# Altium PCB PCB1.PcbDoc (part 3 of 3)
Units mil, origin at the board's own origin, x right, y up, seen from the top; angles counter-clockwise.
Board outline 5410 x 4000 mil, 10 copper layers (Top Layer 1, Top Layer, Layer 5, Layer 3, Layer 1, Layer 2, Layer 4, Layer 6, Bottom Layer, Bottom Layer 1), stack 48.824 mil thick; 53 components, 189 nets, 458 pads, 144 vias.
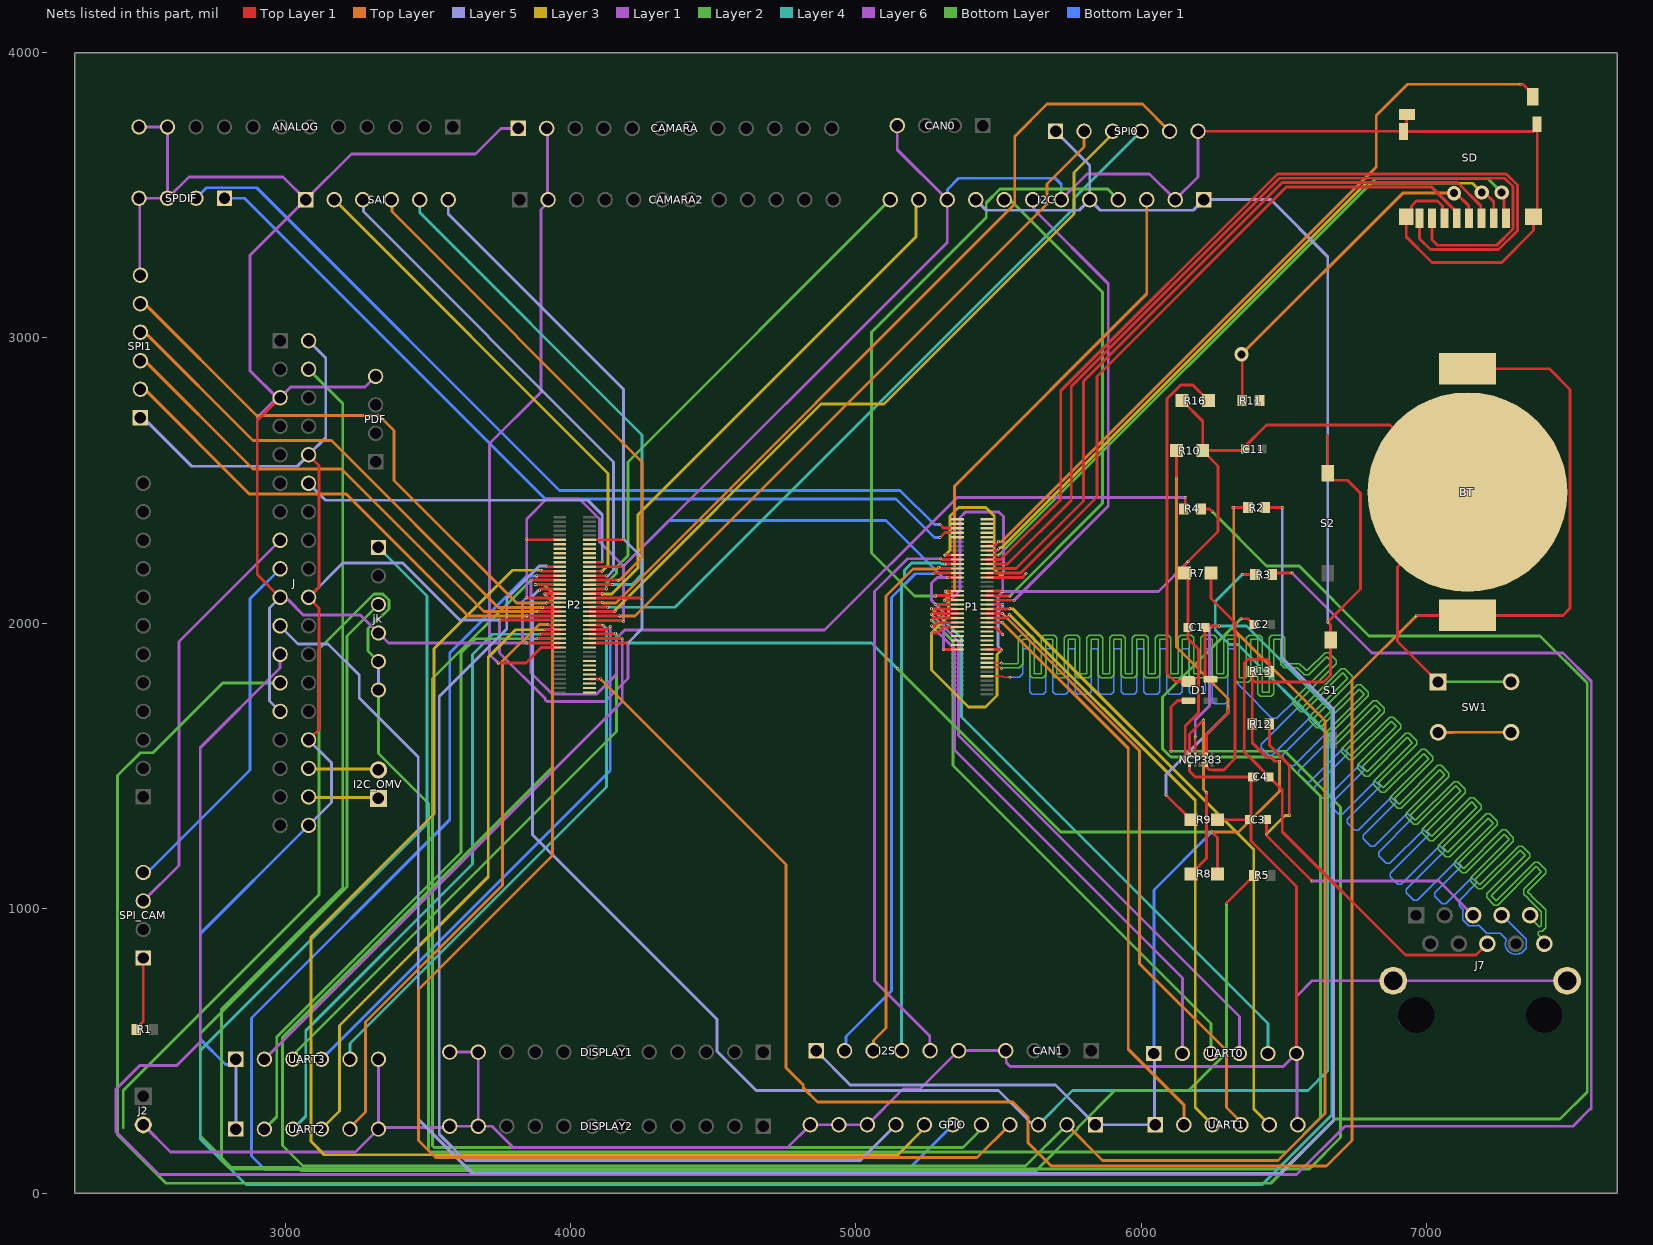
[diagram p11: the nets of this part, all layers, seen from the top]

## Via types
v1: diameter 10, hole 5, Top Layer 1 to Bottom Layer 1, 136 vias
v2: diameter 150, hole 100, Top Layer 1 to Bottom Layer 1, 4 vias
v3: diameter 50, hole 28, Top Layer 1 to Bottom Layer 1, 4 vias

## Nets (pads, with @x,y where several pads share a name; then routed paths per layer and width w, separated by ;. In a path a pad name is that pad's centre, name@x,y a point inside that pad or via, vN(x,y) a via of type N, cw(c..) or ccw(c..) an arc to the next point about the centre after c; other vN are vias at no path point) (continued)
ETH_C_P: J7.7 P1.9 | length 9533.3
  Top Layer 1 w5: P1.9@5460,1812.99 5460.37,1813.37 5514.31,1813.37 5517.68,1810 v1(5540,1810)
  Bottom Layer 1 w5: v1(5540,1810) 5560,1810 5573.11,1810 5584.82,1821.72 5584.82,1910 5609.82,1910 5609.82,1758.14 5618.61,1749.36 5656.04,1749.36 5664.82,1758.14 5664.82,1910 5689.82,1910 5689.82,1758.14 5698.61,1749.36 5736.04,1749.36 5744.82,1758.14 5744.82,1910 5769.82,1910 5769.82,1758.14 5778.61,1749.36 5816.04,1749.36 5824.82,1758.14 5824.82,1910 5849.82,1910 5849.82,1758.14 5858.61,1749.36 5896.04,1749.36 5904.82,1758.14 5904.82,1910 5929.82,1910 5929.82,1758.14 5938.61,1749.36 5976.04,1749.36 5984.82,1758.14 5984.82,1910 6009.82,1910 6009.82,1758.14 6018.61,1749.36 6056.04,1749.36 6064.82,1758.14 6064.82,1910 6089.82,1910 6089.82,1758.14 6098.61,1749.36 6136.04,1749.36 6144.82,1758.14 6144.82,1910 6169.82,1910 6169.82,1758.14 6178.61,1749.36 6216.04,1749.36 6224.82,1758.14 6224.82,1910 6249.82,1910 6249.82,1726.29 6258.61,1717.5 6296.04,1717.5 6304.82,1726.29 6304.82,1910 6329.82,1910 6329.82,1795.18 6370,1755 6450,1675 6454.87,1670.13 6459.27,1665.73 6475.84,1665.73 6538.26,1728.16 6555.94,1710.48 6420.73,1575.27 6420.73,1562.85 6447.2,1536.38 6459.62,1536.38 6594.83,1671.59 6612.51,1653.91 6496.77,1538.17 6496.77,1525.75 6523.23,1499.28 6535.66,1499.28 6651.4,1615.02 6669.08,1597.34 6553.34,1481.6 6553.34,1469.18 6579.8,1442.71 6592.23,1442.71 6707.97,1558.45 6725.65,1540.78 6609.91,1425.04 6609.91,1412.61 6636.37,1386.15 6648.8,1386.15 6764.54,1501.88 6782.21,1484.21 6666.47,1368.47 6666.47,1356.04 6692.94,1329.58 6705.37,1329.58 6821.1,1445.32 6838.78,1427.64 6723.04,1311.9 6723.04,1299.47 6749.51,1273.01 6761.93,1273.01 6877.67,1388.75 6895.35,1371.07 6779.61,1255.33 6779.61,1242.9 6806.08,1216.44 6818.5,1216.44 6934.24,1332.18 6951.92,1314.5 6833.07,1195.66 6833.07,1183.23 6859.54,1156.77 6871.96,1156.77 6990.81,1275.61 7008.49,1257.93 6873.28,1122.73 6873.28,1110.3 6899.74,1083.83 6912.17,1083.83 7047.38,1219.04 7065.06,1201.37 6929.85,1066.16 6929.85,1053.73 6956.31,1027.27 6968.74,1027.27 7103.95,1162.47 7121.62,1144.8 7030.42,1053.59 7030.42,1041.17 7056.88,1014.7 7069.31,1014.7 7160.52,1105.91 7178.19,1088.23 7115.77,1025.8 7115.77,1009.23 7123.45,1001.55 7128.32,996.68 7129.34,995.66 7129.34,991.52 7127.98,990.16 7127.98,959.84 7149.42,938.41 7179.74,938.41 7181.09,939.76 7185.24,939.76 7213.41,911.59 7259.74,911.59 7280.37,890.96 7280.37,888.89 7280.37,888 ccw(c7314.58,875) 7326.92,840.55 cw(c7328.57,835.83) 7327.83,840.77 7332.86,841.53 7351.17,859.84 7351.17,890.16 7266.33,975 J7.7@7264.58,975
ETH_D_N: J7.10 P1.15 | length 10925.7
  Top Layer 1 w5: P1.15@5460,1860.24 5460.37,1859.86 5496.15,1859.86 5496.62,1859.39 v1(5510.61,1859.39)
  Layer 2 w5: v1(5510.61,1859.39) 5510.96,1859.04 5514.32,1859.04 5515.43,1857.93 5560,1857.93 5566.89,1857.93 5569.82,1860.86 5569.82,1949.15 5578.61,1957.93 5616.04,1957.93 5624.82,1949.15 5624.82,1822.5 5649.82,1822.5 5649.82,1949.15 5658.61,1957.93 5696.04,1957.93 5704.82,1949.15 5704.82,1822.5 5729.82,1822.5 5729.82,1949.15 5738.61,1957.93 5776.04,1957.93 5784.82,1949.15 5784.82,1822.5 5809.82,1822.5 5809.82,1949.15 5818.61,1957.93 5856.04,1957.93 5864.82,1949.15 5864.82,1822.5 5889.82,1822.5 5889.82,1949.15 5898.61,1957.93 5936.04,1957.93 5944.82,1949.15 5944.82,1822.5 5969.82,1822.5 5969.82,1949.15 5978.61,1957.93 6016.04,1957.93 6024.82,1949.15 6024.82,1822.5 6049.82,1822.5 6049.82,1949.15 6058.61,1957.93 6096.04,1957.93 6104.82,1949.15 6104.82,1822.5 6129.82,1822.5 6129.82,1949.15 6138.61,1957.93 6176.04,1957.93 6184.82,1949.15 6184.82,1822.5 6209.82,1822.5 6209.82,1949.15 6218.61,1957.93 6256.04,1957.93 6264.82,1949.15 6264.82,1822.5 6289.82,1822.5 6289.82,1949.15 6298.61,1957.93 6336.04,1957.93 6344.82,1949.15 6344.82,1807.47 6369.82,1807.47 6369.82,1949.15 6378.61,1957.93 6416.04,1957.93 6424.82,1949.15 6424.82,1757.93 6449.82,1757.93 6449.82,1949.15 6458.61,1957.93 6496.04,1957.93 6504.82,1949.15 6504.82,1860.86 6507.75,1857.93 6530,1857.93 6554.61,1857.93 6573.77,1838.77 6578.65,1833.9 6582.79,1833.9 6645.22,1896.32 6657.64,1896.32 6684.11,1869.86 6684.11,1857.43 6548.9,1722.22 6566.58,1704.55 6701.78,1839.76 6714.21,1839.76 6740.67,1813.29 6740.67,1800.86 6605.47,1665.66 6623.14,1647.98 6758.35,1783.19 6770.78,1783.19 6797.24,1756.72 6797.24,1744.3 6662.03,1609.09 6679.71,1591.41 6814.92,1726.62 6827.35,1726.62 6853.81,1700.15 6853.81,1687.73 6718.6,1552.52 6736.28,1534.84 6871.49,1670.05 6883.91,1670.05 6910.38,1643.59 6910.38,1631.16 6775.17,1495.95 6792.85,1478.27 6928.06,1613.48 6940.48,1613.48 6966.95,1587.02 6966.95,1574.59 6831.74,1439.38 6849.42,1421.71 6984.63,1556.91 6997.05,1556.91 7023.52,1530.45 7023.52,1518.02 6888.31,1382.81 6905.99,1365.14 7041.19,1500.34 7053.62,1500.34 7080.08,1473.88 7080.08,1461.45 6944.88,1326.25 6962.55,1308.57 7097.76,1443.78 7110.19,1443.78 7136.65,1417.31 7136.65,1404.89 7001.44,1269.68 7019.12,1252 7154.33,1387.21 7166.76,1387.21 7193.22,1360.74 7193.22,1348.32 7058.01,1213.11 7075.69,1195.43 7210.9,1330.64 7223.33,1330.64 7249.79,1304.18 7249.79,1291.75 7114.58,1156.54 7132.26,1138.86 7267.47,1274.07 7279.89,1274.07 7306.36,1247.61 7306.36,1235.18 7171.15,1099.97 7188.83,1082.29 7324.04,1217.5 7336.46,1217.5 7362.93,1191.04 7362.93,1178.61 7227.72,1043.4 7245.4,1025.73 7380.6,1160.93 7393.03,1160.93 7419.5,1134.47 7419.5,1122.04 7357.07,1059.62 7357.07,1055.47 7366.4,1046.15 7371.27,1041.27 7418.77,993.77 7418.77,930.95 7407.06,919.24 7396.7,919.24 7393.77,916.31 7393.77,905.95 7414.58,885.14 J7.10@7414.58,875
ETH_D_P: J7.9 P1.13 | length 10876.2
  Top Layer 1 w5: P1.13@5460,1844.49 5460.37,1844.86 5489.94,1844.86 5490.41,1844.39 v1@5509.93,1844.39
  Layer 2 w5: v1(5510,1840.87) 5510.96,1841.82 5514.32,1841.82 5515.43,1842.93 5560,1842.93 5573.11,1842.93 5584.82,1854.65 5584.82,1942.93 5609.82,1942.93 5609.82,1816.29 5618.61,1807.5 5656.04,1807.5 5664.82,1816.29 5664.82,1942.93 5689.82,1942.93 5689.82,1816.29 5698.61,1807.5 5736.04,1807.5 5744.82,1816.29 5744.82,1942.93 5769.82,1942.93 5769.82,1816.29 5778.61,1807.5 5816.04,1807.5 5824.82,1816.29 5824.82,1942.93 5849.82,1942.93 5849.82,1816.29 5858.61,1807.5 5896.04,1807.5 5904.82,1816.29 5904.82,1942.93 5929.82,1942.93 5929.82,1816.29 5938.61,1807.5 5976.04,1807.5 5984.82,1816.29 5984.82,1942.93 6009.82,1942.93 6009.82,1816.29 6018.61,1807.5 6056.04,1807.5 6064.82,1816.29 6064.82,1942.93 6089.82,1942.93 6089.82,1816.29 6098.61,1807.5 6136.04,1807.5 6144.82,1816.29 6144.82,1942.93 6169.82,1942.93 6169.82,1816.29 6178.61,1807.5 6216.04,1807.5 6224.82,1816.29 6224.82,1942.93 6249.82,1942.93 6249.82,1816.29 6258.61,1807.5 6296.04,1807.5 6304.82,1816.29 6304.82,1942.93 6329.82,1942.93 6329.82,1801.26 6338.61,1792.47 6376.04,1792.47 6384.82,1801.26 6384.82,1942.93 6409.82,1942.93 6409.82,1751.72 6418.61,1742.93 6456.04,1742.93 6464.82,1751.72 6464.82,1942.93 6489.82,1942.93 6489.82,1854.65 6501.54,1842.93 6530,1842.93 6548.4,1842.93 6563.17,1828.17 6568.04,1823.29 6572.43,1818.9 6589,1818.9 6651.43,1881.32 6669.11,1863.65 6533.9,1728.44 6533.9,1716.01 6560.36,1689.55 6572.79,1689.55 6708,1824.76 6725.67,1807.08 6590.47,1671.87 6590.47,1659.44 6616.93,1632.98 6629.36,1632.98 6764.57,1768.19 6782.24,1750.51 6647.03,1615.3 6647.03,1602.87 6673.5,1576.41 6685.93,1576.41 6821.13,1711.62 6838.81,1693.94 6703.6,1558.73 6703.6,1546.31 6730.07,1519.84 6742.49,1519.84 6877.7,1655.05 6895.38,1637.37 6760.17,1502.16 6760.17,1489.74 6786.64,1463.27 6799.06,1463.27 6934.27,1598.48 6951.95,1580.8 6816.74,1445.6 6816.74,1433.17 6843.2,1406.7 6855.63,1406.7 6990.84,1541.91 7008.52,1524.24 6873.31,1389.03 6873.31,1376.6 6899.77,1350.14 6912.2,1350.14 7047.41,1485.34 7065.08,1467.67 6929.88,1332.46 6929.88,1320.03 6956.34,1293.57 6968.77,1293.57 7103.98,1428.78 7121.65,1411.1 6986.44,1275.89 6986.44,1263.46 7012.91,1237 7025.34,1237 7160.54,1372.21 7178.22,1354.53 7043.01,1219.32 7043.01,1206.9 7069.48,1180.43 7081.9,1180.43 7217.11,1315.64 7234.79,1297.96 7099.58,1162.75 7099.58,1150.33 7126.05,1123.86 7138.47,1123.86 7273.68,1259.07 7291.36,1241.39 7156.15,1106.19 7156.15,1093.76 7182.61,1067.29 7195.04,1067.29 7330.25,1202.5 7347.93,1184.83 7212.72,1049.62 7212.72,1037.19 7239.18,1010.73 7251.61,1010.73 7386.82,1145.93 7404.5,1128.26 7342.07,1065.83 7342.07,1049.26 7355.79,1035.54 7360.67,1030.67 7403.77,987.56 7403.77,937.17 7400.84,934.24 7396.7,934.24 7364.58,966.36 J7.9@7364.58,975
ETH_LED1: P1.17
ETH_LED2: P1.19
GND: ANALOG.11 ANALOG.12 BT.3 C1.1 C3.1 C4.1 C11.1 CAMARA.01 CAN0.04 CAN1.04 DISPLAY1.11 DISPLAY1.12 DISPLAY2.11 DISPLAY2.12 GPIO.09 GPIO.10 GPIO.11 I2C.02 I2C.06 I2C.10 I2S.06 J2.02 J7.S1 J7.S2 J.05 J.19 J.27 jk.04 NCP383.1 P1.22 P1.31 P1.42 P1.47 P1.54 P2.24 P2.33 P2.44 P2.57 P2.70 PDF.04 R7.1 R9.2 R10.2 R16.1 SAI.01 SD.6 SD.10 SD.S1 SD.S2 SD.S3 SD.S4 SPDIF.03 SPDIF.04 SPI0.06 SPI1.06 SW1.1 SW1.2 UART0.06 UART1.06 UART2.06 UART3.06 | length 27974.1
  Top Layer 1 w10: J.19@2980,2090 2900,2170 2900,2710 J.05@2980,2790 ; v1(3845,2090) 3847.72,2087.28 P2.44@3961.06,2087.28 ; v1(3845,2295) 3847.99,2292.01 P2.70@3961.06,2292.01 ; v1@3845.1,1929.9 3960.96,1929.9 P2.24@3961.06,1929.8 ; P2.33@4065,2008.54 4181.46,2008.54 v1(4185,2005) ; P2.57@4082.44,2197.52 4182.52,2197.52 v1(4185,2200) ; v1(5280,2065) v1(5280,2065) P1.42@5356.06,2064.96 ; v1(5307.48,1907.48) P1.22@5356.06,1907.48 ; v1(5320,2160) 5320.55,2159.45 P1.54@5356.06,2159.45 ; P1.31@5460,1986.22 5461.06,1985.16 5489.84,1985.16 v1(5515,1960) ; P1.47@5460,2112.21 5513.5,2112.21 v1(5515,2110.71) ; R16.1@6143.74,2780 6216.26,2707.48 R10.2@6216.26,2605 ; SPI0.06@6200,3725 6919.37,3725 SD.S4@6920.16,3724.21 ; R9.2@6267.52,1310 6367.09,1310 6385.47,1291.61 ; C11.1@6365.47,2610 6360.47,2605 R10.2@6216.26,2605 ; C11.1@6365.47,2620 6440.47,2695 6872.89,2695 7108.69,2459.2 BT.3@7145,2459.2 7145,2441.3 6900,2196.3 6900,1935.63 SW1.1@7042.05,1793.58 ; UART0.06@6545,490 6545,1075.36 6385.47,1234.89 6385.47,1291.61 ; SD.10@6932.95,3783.27 6930.91,3781.22 6930.91,3734.96 SD.S4@6920.16,3724.21 ; SD.6@7063.86,3420.08 7057.17,3426.77 7057.17,3462.83 7040,3480 6965,3480 6948.17,3463.17 6948.17,3447.1 6930,3428.94 6930,3355 7020,3265 7265,3265 7376.85,3376.85 SD.S1@7376.85,3425 7389.65,3437.8 SD.S3@7389.65,3737.99 ; SD.S3@7389.65,3749.8 SD.S3@7389.65,3737.99 ; R10.2@6216.26,2605 6270,2551.26 6270,2321 6152.48,2203.48 R7.1@6152.48,2175 6165,2162.48 C1.1@6165,1985 6165,1945 6202,1908 6202,1685.35 6155,1638.35 6155,1520 6165,1510 6170.31,1510 NCP383.1@6170.31,1505 6170.31,1480 6190.31,1460 C4.1@6390.47,1460 6385.47,1455 6385.47,1291.61 ; SD.S4@6920.16,3724.21 7375.87,3724.21 SD.S3@7389.65,3737.99
  Layer 1 w10: ANALOG.12@2485,3740 ANALOG.11@2585,3740 SPDIF.03@2585,3490 ; SPI1.06@2490,3220 2487.5,3222.5 2487.5,3487.5 SPDIF.04@2485,3490 SPDIF.03@2585,3490 ; J2.02@2500,240 2595,145 3245,145 UART2.06@3325,225 ; 2900,2720 J.05@2970,2790 ; J.19@2980,2090 2988.41,2081.59 3008.41,2081.59 3062.5,2027.5 3262.5,2027.5 jk.04@3325,1965 3360,1930 v1(3845,1930) 3830,1945 3830,2075 v1(3845,2090) v1(3845,2295) 3845,2365 3915,2435 4030,2435 4100,2365 4100,2285 v1(4185,2200) ; PDF.04@3315,2865 3277.5,2827.5 3017.5,2827.5 J.05@2980,2790 J.05@2970,2790 ; UART3.06@3325,470 UART2.06@3325,225 ; DISPLAY1.12@3575,495 DISPLAY1.11@3675,495 DISPLAY2.11@3675,235 ; CAMARA.01@3815,3735 3755,3735 3665,3645 3230,3645 SAI.01@3070,3485 ; v1(4185,2005) v1(4185,2200) ; CAN0.04@5145,3745 5145,3660 I2C.10@5320,3485 5320,3335 v1(4185,2200) ; v1(5307.48,1907.48) 5307.48,2037.52 v1(5280,2065) ; v1(5320,2160) 5285,2160 5265,2140 5265,2080 v1(5280,2065) ; v1(5515,1960) 5497.72,1977.28 5497.72,2093.42 v1(5515,2110.71) ; I2C.06@5720,3485 5810,3575 6030,3575 I2C.02@6120,3485 6200,3565 SPI0.06@6200,3725 ; v1(6165,2215) 6060.71,2110.71 v1(5515,2110.71) ; UART1.06@6550,240 6547.5,242.5 6547.5,487.5 UART0.06@6545,490 ; J7.S2@7494.5,745.08 J7.S1@6884.66,745.08 6884.58,745 6600,745 6545,690 UART0.06@6545,490 ; SPDIF.03@2585,3490 2660,3565 2990,3565 SAI.01@3070,3485 ; J.05@2970,2790 2875,2885 2875,3290 SAI.01@3070,3485 ; UART2.06@3325,225 3330,230 3570,230 DISPLAY2.12@3575,235 DISPLAY2.11@3675,235 ; DISPLAY2.11@3675,235 3722.72,235 3797.72,160 4760,160 GPIO.11@4840,240 GPIO.10@4940,240 GPIO.09@5040,240 5165,365 5225,365 I2S.06@5360,500 CAN1.04@5525,500 5526.97,498.03 5526.97,458.03 5540,445 6500,445 UART0.06@6545,490 ; v1(5280,2065) 5316.21,2065 5365,2113.79 5365,2370 5385,2390 5500,2390 5516.89,2373.11 5516.89,2178.46 5515,2176.57 v1(5515,2110.71)
  Layer 5 w10: J.27@2980,1690 2943,1727 2943,2053 J.19@2980,2090
  Bottom Layer w10: SW1.1@7042.05,1793.58 7042.47,1794 7297.53,1794 SW1.2@7297.95,1793.58
  Bottom Layer 1 w10: v1(4185,2200) 4345,2360 5105,2360 5305,2160 v1(5320,2160) ; I2C.10@5320,3485 5321.11,3486.11 5321.11,3521.11 5360,3560 5699.14,3560 5720,3539.14 I2C.06@5720,3485
GPIO_0: GPIO.02 P2.46 R2.1 | length 8572.5
  Top Layer 1 w10: v1(3907.28,2102.28) 3908.03,2103.03 P2.46@3961.06,2103.03 ; v1@6320,2405 v1(6325,2405) R2.1@6374.88,2405
  Layer 2 w10: v1(3907.28,2102.28) 3935,2074.56 3935,1493.79 2988.03,546.82 2988.03,166.97 3060,95 5595,95 GPIO.02@5740,240
  Top Layer w10: GPIO.02@5740,240 5865,115 6480,115 6645,280 6645,1657.5 6325,1977.5 v1(6325,2405)
GPIO_1: GPIO.03 P2.48 R3.1 | length 6304.3
  Top Layer 1 w10: v1(3890,2115) 3893.78,2118.78 P2.48@3961.06,2118.78 ; v1(6355,2170) R3.1@6399.88,2170
  Layer 5 w10: v1(3890,2115) 3885.94,2115 3865,2094.06 3865,1257.28 4511.97,610.31 4511.97,498.03 4650,360 5500,360 5611.59,248.41 5631.59,248.41 GPIO.03@5640,240
  Layer 4 w10: GPIO.03@5640,240 5760,360 6585,360 6655,430 6655,1610 6340,1925 6310,1925 6260,1975 6260,2075 v1(6355,2170)
GPIO_2: GPIO.04 P2.50 | length 4420.9
  Top Layer 1 w10: v1(3875,2135) 3875.47,2134.53 P2.50@3961.06,2134.53
  Top Layer w10: v1(3875,2135) 3905,2135 3935,2105 3935,1185 3465,715 3465,185 3525,125 5425,125 GPIO.04@5540,240
GPIO_3: GPIO.05 P2.52 R4.1 | length 7250.5
  Top Layer 1 w10: v1@3860.28,2150.28 P2.52@3961.06,2150.28 ; R4.1@6149.88,2400 6155,2405.12 v1(6155,2440)
  Layer 1 w10: v1(3860,2150) 3860,1825 3935,1750 4090,1750 4160,1820 4160,1946.21 4188.79,1975 4890,1975 5355,2440 v1(6155,2440)
  Bottom Layer w10: v1@3860.28,2150.28 v1(3860,2150) 3515,1805 3515,165.86 3520.86,160 5375,160 5427.82,212.82 5427.82,215.93 5440,228.11 GPIO.05@5440,240
GPIO_4: GPIO.06 P2.54 | length 5094
  Top Layer 1 w10: v1(3880.28,2165.28) 3881.02,2166.02 P2.54@3961.06,2166.02
  Bottom Layer 1 w10: v1(3880.28,2165.28) 3845.28,2165.28 3575,1895 3575,1310 2880,615 2880,130 2925,85 5185,85 GPIO.06@5340,240
GPIO_5: GPIO.07 P2.56 | length 4685.1
  Top Layer 1 w10: v1(3895,2185) 3898.23,2181.77 P2.56@3961.06,2181.77
  Layer 3 w10: v1(3895,2185) 3795,2185 3520,1910 3520,1330 3088.03,898.03 3088.03,181.97 3135,135 5146.89,135 5240,228.11 GPIO.07@5240,240
GPIO_6: GPIO.08 P2.58 | length 3903.5
  Top Layer 1 w10: v1(3915,2200) 3917.48,2197.52 P2.58@3961.06,2197.52
  Layer 5 w10: v1(3915,2200) 3888.79,2200 3775,2086.21 3775,1978.79 3538.03,1741.82 3538.03,206.97 3630,115 5015,115 GPIO.08@5140,240
HS: CAMARA2.02 CAMARA.02 P2.22 | length 2212.9
  Top Layer 1 w10: v1(3745,1860) 3842.14,1860 3896.2,1914.05 P2.22@3961.06,1914.05
  Layer 6 w10: v1(3745,1860) 3715,1890 3715,2629.31 3895,2809.31 3895,3450.65 3920,3475.65 CAMARA2.02@3920,3485 3917.5,3487.5 3917.5,3732.5 CAMARA.02@3915,3735
I2S_CK: I2S.02 P1.56 | length 1924.7
  Top Layer 1 w10: v1(5271.05,2172.74) 5273.5,2175.2 P1.56@5356.06,2175.2
  Bottom Layer 1 w10: I2S.02@4960,500 4964.68,504.68 4964.68,549.68 5125,710 5125,2090 5207.74,2172.74 v1(5271.05,2172.74)
I2S_SDI: I2S.04 P1.60 | length 1887.4
  Top Layer 1 w10: v1(5311.83,2207.44) 5312.58,2206.69 P1.60@5356.06,2206.69
  Layer 4 w10: I2S.04@5160,500 5160,2150 5170,2160 5170,2185 5195.61,2210.61 5296.82,2210.61 5299.98,2207.44 v1(5311.83,2207.44)
I2S_SDO: I2S.05 P1.62 | length 2031
  Top Layer 1 w10: v1(5297.61,2225.59) 5300.75,2222.44 P1.62@5356.06,2222.44
  Layer 1 w10: I2S.05@5260,500 5258.89,501.11 5258.89,551.11 5065,745 5065,2110 5180.59,2225.59 v1(5297.61,2225.59)
I2S_WS: I2S.03 P1.58 | length 1908.3
  Top Layer 1 w10: v1(5290.61,2195.61) 5295.27,2190.95 P1.58@5356.06,2190.95
  Top Layer w10: I2S.03@5060,500 5061.11,501.11 5061.11,536.11 5105,580 5105,2095 5200,2190 5285,2190 v1(5290.61,2195.61)
JTAG_RESET: P1.73
JTAG_TCK/SCK: P1.77
JTAG_TD0/SWO: P1.79
JTAG_TMS/SWD: P1.75
LICELL: BT.1 BT.2 P2.7 | length 7537.8
  Top Layer 1 w10: P2.7@4065,1803.82 v1(4103.82,1803.82) ; v1(6965,2025) 6966.72,2026.72 7480,2026.72 7505,2051.72 7505,2819 7432.32,2891.68 BT.2@7145,2891.68
  Top Layer w10: v1(4103.82,1803.82) 4755,1152.64 4755,440 4815,380 4815,370 4865,320 5550,320 5603.03,266.97 5603.03,176.97 5685,95 6650,95 6740,185 6740,1800 v1(6965,2025)
MISO_OMV: J.15 SPI_CAM.03 | length 1463.8
  Layer 6 w10: SPI_CAM.03@2500,1025 2625,1150 2625,1935 J.15@2980,2290
MOSI_OMV: J.17 SPI_CAM.04 | length 1272.6
  Bottom Layer 1 w10: SPI_CAM.04@2500,1125 2511.89,1125 2524.07,1137.18 2527.18,1137.18 2875,1485 2875,2085 J.17@2980,2190
NetC2_1: C2.1 jk.05 jk.06 | length 9904.8
  Top Layer 1 w10: v1(6350,2015) 6375.47,2015 C2.1@6395.47,1995
  Layer 5 w10: jk.06@3325,1765 jk.05@3325,1865
  Bottom Layer w10: 2430,230 2430,360 3116.97,1046.97 3116.97,1909.25 3309.69,2101.97 3340.31,2101.97 3361.97,2080.31 3361.97,2049.69 3327.28,2015 3322.72,2015 3288.03,1980.31 3288.03,1901.97 jk.05@3325,1865 ; jk.06@3325,1765 3325,1541.74 3500,1366.74 3500,150.86 3505.86,145 6510,145 6630,265 6630,1391.21 6491.21,1530 6105,1530 6100,1535 6098.79,1535 6075,1558.79 6075,1740 v1(6350,2015)
NetC3_2: C3.2 J7.5 R12.2 | length 1351.4
  Top Layer 1 w10: C3.2@6440,1310 v1(6440,1260) 6440,1255 v1(6600,1095) ; R12.2@6450.12,1645 6450.12,1571.1 6520,1501.21 v1(6519.98,1325.02)
  Layer 3 w10: v1(6440,1260) 6505.02,1325.02 v1(6519.98,1325.02)
  Layer 6 w10: v1(6600,1095) 7044.58,1095 J7.5@7164.58,975
NetC4_2: C4.2 J7.6 R13.2 | length 1693.2
  Top Layer 1 w10: R13.2@6450.24,1830 6450.24,1862.76 6440,1873 6375,1873 6362,1860 6362,1548 6416.22,1493.78 6416.22,1493.31 6495,1414.53 6495,1268 6928,835 7174.58,835 J7.6@7214.58,875
NetD1_1: D1.1 R16.2 | length 1239.2
  Top Layer 1 w10: D1.1@6166.42,1794.53 6119,1794.53 6091,1822.53 6091,2786.68 6139.32,2835 6181.26,2835 R16.2@6236.26,2780
NetD1_2: D1.2 jk.03 | length 8278.6
  Top Layer 1 w10: v1(6105,1550) 6105,1705 6127.6,1727.6 D1.2@6166.42,1727.6
  Bottom Layer w10: jk.03@3325,2065 3215,1955 3215,1075 2700,560 2700,200 2815,85 6590,85 6700,195 6700,1355 6505,1550 v1(6105,1550)
NetJ_04: J.04 R5.1 | length 7375.4
  Top Layer 1 w10: v1(6300,1015) 6300,1017.87 6394.76,1112.64 R5.1@6394.76,1115
  Layer 2 w10: J.04@3080,2890 3200,2770 3200,1070 2775,645 2775,115 2800,90 3043.79,90 3053.79,80 5632.28,80 5776.97,224.69 5776.97,229.25 5908.7,360.98 6168.27,360.98 6300,492.72 v1(6300,1015)
NetJ_21: J.21 R2.2 | length 7643.6
  Top Layer 1 w10: R2.2@6435.12,2405 v1(6495,2405)
  Layer 5 w10: J.21@2980,1990 3043.03,1926.97 3148.03,1926.97 3257.5,1817.5 3257.5,1737.5 3464.39,1530.61 3464.39,259.39 3653.79,70 6490,70 6675.86,255.86 6675.86,264.14 6675,265 6675,1697.5 6495,1877.5 v1(6495,2405)
NetJ_23: J.23 R3.2 | length 10099.9
  Top Layer 1 w10: R3.2@6460.12,2170 6465.12,2175 v1(6530,2175)
  Layer 1 w10: J.23@2980,1890 2980,1842.28 2700,1562.28 2700,530 2617.5,447.5 2487.5,447.5 2405,365 2405,215 2555,65 6545,65 6715,235 7515,235 7575,295 7579.14,295 7579.14,1795.86 7480,1895 6810,1895 v1(6530,2175)
NetJ_25: J.25 R4.2 | length 10364.6
  Top Layer 1 w10: R4.2@6210.12,2400 6240,2400 v1(6250,2390)
  Layer 2 w10: J.25@2980,1790 2778.79,1790 2533.79,1545 2490,1545 2410,1465 2410,205 2580,35 6455,35 6680,260 7470,260 7565,355 7565,1789.14 7399.14,1955 6800,1955 6555,2200 6440,2200 v1(6250,2390)
NetNCP383_7: NCP383.7 R9.1 R10.1 | length 1695.8
  Top Layer 1 w10: v1(6088,1397) R9.1@6175,1310 ; v1(6123.74,2506) R10.1@6123.74,2605 ; NCP383.7@6229.37,1536.5 6229.37,1609.37 6305,1685 v1(6305,1705)
  Top Layer w10: v1(6123.74,2506) 6123.74,1916.26 6305,1735 v1(6305,1705)
  Layer 5 w10: v1(6088,1397) 6088,1468 6305,1685 v1(6305,1705)
NetP1_72: P1.72
NetP2_1: P2.1
NetP2_3: P2.3
NetP2_5: P2.5
NetR1_1: R1.1 SPI_CAM.01 | length 260.4
  Top Layer 1 w10: R1.1@2474.88,575 2474.88,577.36 2500,602.48 SPI_CAM.01@2500,825
NetR11_1: R11.1 SD.4 | length 1260.3
  Top Layer 1 w10: v3@6350,2945 v3(6352.5,2942.5) 6355,2940 R11.1@6355,2780 ; v3(7097.75,3507.75) 7105.18,3507.75 7149.26,3463.67 7149.26,3421.3 SD.4@7150.47,3420.08
  Top Layer w10: v3(6352.5,2942.5) 6917.75,3507.75 v3(7097.75,3507.75)
PWM_0: J.12 P2.59 | length 1286.3
  Top Layer 1 w10: P2.59@4065,2213.27 4108.27,2213.27 v1(4110,2215)
  Layer 5 w10: J.12@3080,2490 3139.2,2430.8 4059.2,2430.8 4110,2380 v1(4110,2215)
PWM_1: P2.61
PWM_2: P2.63
PWM_3: P2.65
PWM_4: P2.67
PWM_5: P2.60
PWM_6: P2.62
PWM_7: P2.64
PWM_8: P2.66
PWM_9: P2.68
PWRON: SW1.3 SW1.4 | length 256.4
  Top Layer w10: SW1.3@7042.05,1616.42 7095.42,1616.42 7096,1617 7297.37,1617 SW1.4@7297.95,1616.42
RST: P2.21
RX: P1.76 SPDIF.02 | length 3181.1
  Top Layer 1 w10: v1(5295,2345) 5307.32,2332.68 P1.76@5356.06,2332.68
  Bottom Layer 1 w10: SPDIF.02@2685,3490 2721.97,3526.97 2898.03,3526.97 3960,2465 5155,2465 5275,2345 v1(5295,2345)
RX_N: P2.15
RX_P: P2.13
SAI_CK: P2.49 SAI.05 | length 1837.3
  Top Layer 1 w10: P2.49@4065,2134.53 4144.53,2134.53 v1(4145,2135)
  Layer 4 w10: SAI.05@3470,3485 3470,3440 4250,2660 4250,2170.86 4214.14,2135 v1(4145,2135)
SAI_D0: P2.53 SAI.03 | length 1757.7
  Top Layer 1 w10: P2.53@4065,2166.02 4124.25,2166.02 v1(4125,2165.28)
  Layer 5 w10: SAI.03@3270,3485 3271.97,3483.03 3271.97,3443.03 4150,2565 4150,2185.55 4129.72,2165.28 v1(4125,2165.28)
SAI_D1: P2.55 SAI.02 | length 1753.7
  Top Layer 1 w10: P2.55@4065,2181.77 v1(4109.25,2181.77)
  Layer 3 w10: SAI.02@3170,3485 4130,2525 4130,2202.52 v1(4109.25,2181.77)
SAI_FS: P2.51 SAI.04 | length 1837.8
  Top Layer 1 w10: P2.51@4065,2150.28 4164.72,2150.28 v1(4165,2150)
  Top Layer w10: SAI.04@3370,3485 3371.97,3483.03 3371.97,3443.03 4250,2565 4250,2230 4170,2150 v1(4165,2150)
SCL0: I2C.04 P1.46 | length 2257.7
  Top Layer 1 w10: v1(5280,2095) 5281.46,2096.46 P1.46@5356.06,2096.46
  Layer 2 w10: v1(5280,2095) 5205,2095 5055,2245 5055,3020 5456.97,3421.97 5456.97,3474.25 5504.69,3521.97 5883.03,3521.97 I2C.04@5920,3485
SCL1: I2C.08 P1.45 | length 1759.8
  Top Layer 1 w10: P1.45@5460,2096.46 5476.38,2096.46 5477.44,2095.39 5481.87,2095.39 5482.27,2095 v1(5540,2095)
  Layer 2 w10: I2C.08@5520,3485 5528.41,3476.59 5548.41,3476.59 5865,3160 5865,2420 v1(5540,2095)
SCL2: I2C.12 P2.47 | length 1838.8
  Top Layer 1 w10: P2.47@4065,2118.78 4124.25,2118.78 v1(4125,2119.53)
  Bottom Layer w10: v1(4125,2119.53) 4123.92,2120.61 4123.92,2138.26 4160,2174.34 4160,2196.21 4200,2236.21 4200,2565 I2C.12@5120,3485
SCL_OMV: I2C_OMV.02 J.32 | length 247.1
  Layer 3 w10: J.32@3080,1490 3082.5,1487.5 3322.5,1487.5 I2C_OMV.02@3325,1485
SDA0: I2C.03 P1.44 | length 1745.4
  Top Layer 1 w10: v1(5310,2080) 5310.71,2080.71 P1.44@5356.06,2080.71
  Top Layer w10: v1(5310,2080) 5345,2115 5345,2480 6020,3155 I2C.03@6020,3485
SDA1: I2C.07 P1.43 | length 1746.8
  Top Layer 1 w10: P1.43@5460,2080.71 5460.71,2080 v1(5555,2080)
  Layer 6 w10: v1(5555,2080) 5885,2410 5885,3190 5624.68,3450.32 5624.68,3480.32 I2C.07@5620,3485
SDA2: I2C.11 P2.45 | length 1907.4
  Top Layer 1 w10: P2.45@4065,2103.03 4109.25,2103.03 v1(4110,2102.28)
  Layer 3 w10: v1(4110,2102.28) 4143.5,2102.28 4235,2193.79 4235,2380 5210,3355 5210,3457.17 5211.59,3458.77 5211.59,3476.59 I2C.11@5220,3485
SDA_OMV: I2C_OMV.01 J.34 | length 247.1
  Layer 3 w10: J.34@3080,1390 3082.5,1387.5 3322.5,1387.5 I2C_OMV.01@3325,1385
SDC_CD: P1.67 SD.9 | length 2715.4
  Top Layer 1 w10: P1.67@5460,2269.69 5461.06,2270.75 5485.84,2270.75 5500,2284.91 v1(5500,2285) ; v1(7330,3890) 7335,3890 7340,3890 7373.9,3856.1 SD.9@7373.9,3845.28
  Top Layer w10: v1(5500,2285) 5510,2285 6825,3600 6825,3780 6935,3890 v1(7330,3890)
SDC_CLK: P1.55 SD.5 | length 2513.5
  Top Layer 1 w10: P1.55@5460,2175.2 5577.77,2175.2 5845,2442.43 5845,2865 6510,3530 7017.92,3530 7107.17,3440.75 SD.5@7107.17,3420.08
SDC_CMD: P1.57 SD.3 | length 2616.5
  Top Layer 1 w10: P1.57@5460,2190.95 5560.95,2190.95 5798.29,2428.29 5798.29,2848.29 6495,3545 7110,3545 7191.33,3463.67 7191.33,3422.53 SD.3@7193.78,3420.08
SDC_D0: P1.59 SD.7 | length 3191.9
  Top Layer 1 w10: P1.59@5460,2206.69 5531.69,2206.69 5755,2430 5755,2830 6485,3560 7275,3560 7304.17,3530.83 7304.17,3520.32 7305,3519.5 7305,3490.5 7304.17,3489.68 7304.17,3381.49 7247.68,3325 7040,3325 7020.55,3344.45 SD.7@7020.55,3420.08
SDC_D1: P1.61 SD.8 | length 3277.8
  Top Layer 1 w10: P1.61@5460,2222.44 5507.44,2222.44 5718.43,2433.43 5718.43,2814.65 6478.79,3575 7281.21,3575 7320,3536.21 7320,3376.1 7253.9,3310 7015,3310 6977.24,3347.76 SD.8@6977.24,3420.08
SDC_D2: P1.63 SD.1 | length 2469.6
  Top Layer 1 w10: P1.63@5460,2238.19 5501.81,2238.19 v1(5501.89,2238.11) ; v3(7265,3510) 7272.65,3502.35 7272.65,3427.82 SD.1@7280.39,3420.08
  Bottom Layer w10: v1(5501.89,2238.11) 6823.79,3560 7215,3560 v3(7265,3510)
SDC_D3: P1.65 SD.2 | length 2395.7
  Top Layer 1 w10: P1.65@5460,2253.94 5494.14,2253.94 5500,2259.8 v1(5500,2260) ; v3(7195,3510) 7205,3510 7237.09,3477.91 SD.2@7237.09,3420.08
  Layer 3 w10: v1(5500,2260) 5505,2265 5511.21,2265 6788.96,3542.75 7162.25,3542.75 v3(7195,3510)
SDC_RST: P1.71
SDC_WP: P1.69
SPI0_CK: P2.37 SPI0.03 | length 2626.7
  Top Layer 1 w10: P2.37@4065,2040.04 v1(4155,2040) v1(4155,2040)
  Layer 3 w10: v1(4155,2040) 4155,2045 4877.88,2767.88 5097.88,2767.88 5765,3435 5765,3580 5900,3715 SPI0.03@5900,3725
SPI0_CS: P2.35 SPI0.02 | length 2512.7
  Top Layer 1 w10: P2.35@4065,2024.29 4169.29,2024.29 v1(4170,2025)
  Top Layer w10: v1(4170,2025) 4225,2025 5670,3470 5670,3540 5800,3670 SPI0.02@5800,3725
SPI0_MISO: P2.39 SPI0.04 | length 2647.5
  Top Layer 1 w10: P2.39@4065,2055.79 4129.25,2055.79 v1(4130,2055.04)
  Layer 4 w10: v1(4130,2055.04) 4365.04,2055.04 5765,3455 5765,3490 SPI0.04@6000,3725
SPI0_MOSI: P2.41 SPI0.05 | length 2938.8
  Top Layer 1 w10: P2.41@4065,2071.53 4109.25,2071.53 v1(4110,2072.28)
  Top Layer w10: v1(4110,2072.28) 4112.72,2072.28 4114.21,2070.79 4158.07,2070.79 5556.97,3469.69 5556.97,3706.97 5670,3820 6005,3820 SPI0.05@6100,3725
SPI1_CK: P2.38 SPI1.03 | length 1820.6
  Top Layer 1 w10: v1(3885,2040) 3961.02,2040 P2.38@3961.06,2040.04
  Top Layer w10: SPI1.03@2505,2920 2885,2540 3195,2540 3695,2040 v1(3885,2040)
SPI1_CS: P2.36 SPI1.02 | length 1785.7
  Top Layer 1 w10: v1(3845,2025) 3960.35,2025 P2.36@3961.06,2024.29
  Top Layer w10: SPI1.02@2505,2820 2871.97,2453.03 3211.97,2453.03 3640,2025 v1(3845,2025)
SPI1_MISO: P2.40 SPI1.04 | length 1856.1
  Top Layer 1 w10: v1(3900,2055) 3943.62,2055 3944.41,2055.79 P2.40@3961.06,2055.79
  Top Layer w10: SPI1.04@2505,3020 2885,2640 3160,2640 3745,2055 v1(3900,2055)
SPI1_MOSI: P2.42 SPI1.05 | length 1994.1
  Top Layer 1 w10: v1(3915,2070) 3916.53,2071.53 P2.42@3961.06,2071.53
  Top Layer w10: SPI1.05@2505,3120 2896.97,2728.03 3326.97,2728.03 3380,2675 3380,2500 3810,2070 v1(3915,2070)
TDI: P1.80
TRST: P1.78
TX: P1.74 SPDIF.01 | length 3071
  Top Layer 1 w10: v1(5295,2300) 5311.93,2316.93 P1.74@5356.06,2316.93
  Bottom Layer 1 w10: SPDIF.01@2785,3490 2855,3490 3910,2435 5140,2435 5275,2300 v1(5295,2300)
TX_N: P2.11
TX_P: P2.9
UART0_CTS: P1.40 UART0.05 | length 2141
  Top Layer 1 w10: v1(5265,2050) 5265.79,2049.21 P1.40@5356.06,2049.21
  Layer 4 w10: v1(5265,2050) 5269.58,2045.42 5270.95,2045.42 5370,1946.37 5370,1670 6445,595 UART0.05@6445,490
UART0_RTS: P1.38 UART0.04 | length 2080.5
  Top Layer 1 w10: v1(5264.74,2030.42) 5267.78,2033.46 P1.38@5356.06,2033.46
  Layer 6 w10: v1(5264.74,2030.42) 5360,1935.16 5360,1605 6345,620 UART0.04@6345,490
UART0_RX: P1.36 UART0.03 | length 2022
  Top Layer 1 w10: v1(5264.47,2009.47) 5272.72,2017.72 P1.36@5356.06,2017.72
  Bottom Layer w10: v1(5264.47,2009.47) 5266.74,2009.47 5340,1936.21 5340,1500 6245,595 UART0.03@6245,490
UART0_TX: P1.34 UART0.02 | length 1960.5
  Top Layer 1 w10: v1(5265,1990) 5275,1990 5285.9,2000.9 5338.62,2000.9 5339.68,2001.97 P1.34@5356.06,2001.97
  Layer 6 w10: v1(5265,1990) 5345,1910 5345,1555 6145,755 UART0.02@6145,490
UART1_CTS: P1.39 UART1.05 | length 2273.1
  Top Layer 1 w10: P1.39@5460,2049.21 5539.21,2049.21 v1(5540,2050)
  Layer 3 w10: v1(5540,2050) 5550,2050 6395,1205 6395,295 UART1.05@6450,240
UART1_RTS: P1.37 UART1.04 | length 2193.4
  Top Layer 1 w10: P1.37@5460,2033.46 v1(5513.46,2033.46)
  Top Layer w10: v1(5513.46,2033.46) 5995,1551.93 5995,805 6300,500 6300,300 6350,250 UART1.04@6350,240
UART1_RX: P1.35 UART1.03 | length 2167.3
  Top Layer 1 w10: P1.35@5460,2017.72 5527.72,2017.72 v1(5539.07,2029.07)
  Layer 3 w10: v1(5539.07,2029.07) 6190,1378.14 6190,300 UART1.03@6250,240
UART1_TX: P1.33 UART1.02 | length 2079.7
  Top Layer 1 w10: P1.33@5460,2001.97 5511.97,2001.97 v1(5512.72,2002.72)
  Top Layer w10: v1(5512.72,2002.72) 5955,1560.43 5955,505 6150,310 UART1.02@6150,240
UART2_CTS: P2.32 UART2.05 | length 2118.1
  Top Layer 1 w10: v1(3920,1995) 3922.21,1992.79 P2.32@3961.06,1992.79
  Top Layer w10: UART2.05@3225,225 3225,230 3280,285 3280,600 3760,1080 3760,1866.21 3888.79,1995 v1(3920,1995)
UART2_RTS: P2.30 UART2.04 | length 2188.6
  Top Layer 1 w10: v1(3906.3,1976.3) 3907.05,1977.05 P2.30@3961.06,1977.05
  Layer 3 w10: UART2.04@3125,225 3188.03,288.03 3188.03,588.03 3710,1110 3710,1880 3806.3,1976.3 v1(3906.3,1976.3)
UART2_RX: P2.28 UART2.03 | length 2261.5
  Top Layer 1 w10: v1(3890.55,1960.55) 3891.3,1961.3 P2.28@3961.06,1961.3
  Layer 4 w10: UART2.03@3025,225 3070,270 3070,570 3655,1155 3655,1890 3725.55,1960.55 v1(3890.55,1960.55)
UART2_TX: P2.26 UART2.02 | length 2322.8
  Top Layer 1 w10: v1(3880,1945) 3880.55,1945.55 P2.26@3961.06,1945.55
  Layer 2 w10: UART2.02@2925,225 2968.09,268.09 2968.09,548.09 3615,1195 3615,1895 3665,1945 v1(3880,1945)
UART3_CTS: P2.31 UART3.05 | length 1948.1
  Top Layer 1 w10: P2.31@4065,1992.79 4112.21,1992.79 v1(4112.95,1992.05)
  Layer 4 w10: UART3.05@3225,470 3225,525 4125,1425 4125,1980 v1(4112.95,1992.05)
UART3_RTS: P2.29 UART3.04 | length 2015.4
  Top Layer 1 w10: P2.29@4065,1977.05 4127.05,1977.05 v1(4138.11,1988.11)
  Bottom Layer 1 w10: UART3.04@3125,470 4138.11,1483.11 v1(4138.11,1988.11)
UART3_RX: P2.27 UART3.03 | length 2058.2
  Top Layer 1 w10: P2.27@4065,1961.3 4153.87,1961.3 v1(4156.56,1963.99)
  Layer 2 w10: UART3.03@3025,470 3025,481.89 3037.18,494.07 3037.18,497.18 4160,1620 4160,1960.55 v1(4156.56,1963.99)
UART3_TX: P2.25 UART3.02 | length 2110.2
  Top Layer 1 w10: P2.25@4065,1945.55 4178.9,1945.55 4179.45,1945 v1@4178.79,1945
  Layer 1 w10: UART3.02@2925,470 4180,1725 v1(4180,1945)
USB0_D_N: P1.28
USB0_D_P: P1.26
USB0_ID: P1.30
USB0_VBUS: P1.24
USB1_D_N: P1.27
USB1_D_P: P1.25
USB1_ID: P1.29
USB1_VBUS: P1.23
USBA_VBUS_EN: NCP383.4 R7.2 | length 816.1
  Top Layer 1 w10: NCP383.4@6229.37,1505 6229.37,1495.78 6239.99,1485.16 6249.84,1485.16 6250,1485 6290,1485 6330,1525 6330,2001.23 6245,2086.23 R7.2@6245,2175
USBA_VBUS_FLAG: NCP383.10 R8.1 | length 709.8
  Top Layer 1 w10: NCP383.10@6170.31,1536.5 6170.31,1610.31 v1(6219.39,1659.39) ; R8.1@6175,1120 6230,1175 v1(6230,1405)
  Top Layer w10: v1(6219.39,1659.39) 6219.39,1415.61 v1(6230,1405)
VBUS: C1.2 D1.4 jk.01 NCP383.9 | length 9305.2
  Top Layer 1 w10: NCP383.9@6190,1536.5 v1(6190,1600) ; D1.4@6243.58,1802.4 6224.06,1802.4 C1.2@6224.06,1985 6229.06,1990 v1(6275,1990)
  Layer 1 w10: v1(6190,1600) 6190,1660 6240,1710 6240,1980 6250,1990 v1(6275,1990)
  Layer 4 w10: jk.01@3325,2265 3495,2095 3495,1295 2700,500 2700,190 2860,30 6425,30 6670,275 6670,1690 6370,1990 v1(6275,1990)
VCC: GPIO.01 I2C.01 I2C.05 I2C.09 I2S.01 J.02 J.10 J.20 J.30 J.36 P2.23 P2.34 P2.43 P2.69 R8.2 R12.1 R13.1 S1.2 S2.2 SAI.06 SPI0.01 SPI1.01 UART0.01 UART1.01 UART2.01 UART3.01 | length 17863.7
  Top Layer 1 w10: J.30@3080,1590 3117,1627 3117,2053 J.20@3080,2090 3117,2127 3117,2553 J.10@3080,2590 ; v1(3750,2010) 3926.21,2010 3926.61,2009.61 3943.62,2009.61 3944.68,2008.54 P2.34@3961.06,2008.54 ; P2.23@4065,1929.8 4199.8,1929.8 v1(4200,1930) ; P2.43@4065,2087.28 4247.72,2087.28 v1(4250,2085) ; P2.69@4065,2292.01 4182.01,2292.01 v1(4185,2295) ; v1(6248,1267) 6267.52,1247.48 R8.2@6267.52,1120 ; R13.1@6390,1830 6390,1803 ; v1(6485,1515) 6469,1515 6455,1529 6441,1529 6389.88,1580.12 R12.1@6389.88,1645 6389.88,1672.88 6390,1673 6390,1803 ; 6655,2658 6655,2517.32 6671.65,2500.67 6724.33,2500.67 6770,2455 6770,2119 v1(6655,2004) 6665,1994 S1.2@6665,1940.2 6665,1818 6640,1793 6400,1793 6390,1803
  Layer 2 w10: v1(5145,1840) 5718,1267 v1(6248,1267)
  Top Layer w10: v1(6248,1267) 6342,1267 6485,1410 v1(6485,1515)
  Layer 5 w10: SPI1.01@2490,2720 2500,2720 2670,2550 3040,2550 J.10@3080,2590 3140,2650 3140,2930 J.02@3080,2990 ; UART2.01@2825,225 2825,455 UART3.01@2840,470 ; J.36@3080,1290 3160,1370 3160,1510 J.30@3080,1590 ; J.20@3080,2090 3200,2210 3410,2210 3610,2010 v1(3750,2010) ; SAI.06@3570,3485 3570,3435 4185,2820 v1(4185,2295) 4250,2230 v1(4250,2085) 4250,1980 v1(4200,1930) ; I2S.01@4860,500 4980,380 5700,380 GPIO.01@5840,240 UART1.01@6050,240 6047.5,242.5 6047.5,487.5 UART0.01@6045,490 ; I2C.09@5420,3485 5456.97,3448.03 5783.03,3448.03 I2C.05@5820,3485 ; SPI0.01@5700,3725 5820,3605 I2C.05@5820,3485 ; v1(6655,2004) 6655,3285 6455,3485 I2C.01@6220,3485 6183.03,3448.03 5856.97,3448.03 I2C.05@5820,3485
  Layer 4 w10: v1(4200,1930) 5055,1930 v1(5145,1840)
  Layer 6 w10: v1(3750,2010) 3750,1895 3910,1735 3910,1730.86 3915.86,1725 4120,1725 4200,1805 v1(4200,1930)
  Bottom Layer 1 w10: UART3.01@2825,470 2806.11,451.11 2788.89,451.11 2700,540 2700,910 J.36@3080,1290 ; UART0.01@6045,490 6045,1064 v1(6248,1267)
VDD_SD: R11.2
VIN: P1.21 P1.32 P1.41 P1.48 | length 1193.3
  Top Layer 1 w10: v1(5265,1965) 5286.73,1965 5307.64,1985.9 5355.75,1985.9 P1.32@5356.06,1986.22 ; v1(5313.42,2111.46) 5314.17,2112.21 P1.48@5356.06,2112.21 ; P1.21@5460,1907.48 5507.52,1907.48 v1(5510,1905) ; P1.41@5460,2064.96 v1(5515,2065) v1(5515,2065)
  Layer 5 w10: v1(5510,1905) 5497.72,1917.28 5497.72,2038.93 5515,2056.21 v1(5515,2065)
  Layer 3 w10: v1(5313.42,2111.46) 5325,2099.88 5325,2025 v1(5265,1965) 5265,1835 5395,1705 5454.14,1705 5495,1745.86 5495,1890 v1(5510,1905)
VSYS: P1.53 P1.64 | length 825.9
  Top Layer 1 w10: v1(5312.44,2237.44) 5313.19,2238.19 P1.64@5356.06,2238.19 ; P1.53@5460,2159.45 5583.24,2159.45 v1(5596.89,2173.11)
  Layer 3 w10: v1(5312.44,2237.44) 5330,2255 5330,2375 5360,2405 5455,2405 5485,2375 5485,2190 5515,2160 5583.79,2160 v1(5596.89,2173.11)
pads on no net: C2.2 C11.2 CAMARA2.01 DCMI.01 J7. J.01 J.03 J.06 J.07 J.08 J.09 NCP383.5 NCP383.6 NCP383.8 R5.2
copper on no net:
  other v2: 2350,95 7570,105 7570,3900 2350,3915

## Polygon pours and split planes (outlines as drawn)
VBUS on Top Layer 1 "VBUS_L01_P004" (solid, pour order 4): 5985,2905 6145,3065 6635,3065 6810,2890 6810,1225 6555,970 6215,970 5960,1255 5960,1345 5960,2890
CAM_D2_P on Layer 6 "CAM_D2_P_L08_P009" (solid, pour order 9): 3255,3380 3290,3415 6465,3415 7065,2815 7065,1250 6435,620 3625,620 3160,1085 3160,3275 3285,3400
GND on Bottom Layer 1 "GND_L10_P006" (solid, pour order 6): 2315,3265 2635,3585 3595,3585 3840,3340 3840,3180 3375,2715 3375,425 3240,290 2605,290 2605,295 2295,605
GND on Layer 2 "GND_L06_P010" (solid, pour order 10): 3675,3905 3700,3930 7225,3930 7555,3600 7555,845 7140,430 3645,430 3165,910 3165,3505
GND on Layer 1 "GND_L05_P008" (solid, pour order 8): 2346.41,3711.41 2531.58,3896.58 6334.3,3915.7 6455,3795 6455,3350 6295,3190 2505,3190 2505,3235 2355,3385
GND on Layer 1 "GND_L05_P005" (solid, pour order 5): 2630,500 2715,580 2785,635 2820,635 6675,635 6810,500 6810,130 6690,10 2765,10 2630,145
GND on Top Layer "GND_L02_P011" (solid, pour order 11): 5897.5,47.5 5602.5,342.5 5602.5,1327.5 5612.5,1327.5 5957.5,1672.5 7332.5,1672.5 7332.5,1647.5 7612.5,1367.5 7577.5,1332.5 7577.5,237.5 7387.5,47.5

## Silkscreen, mask and mechanical layers (free items; w line width, h text height)
Top Overlay:
  text "PORTENTA BREAKOUT" at 5290,52.41 h200